# EAGLE board l1b_mk2a (EAGLE 6.4)
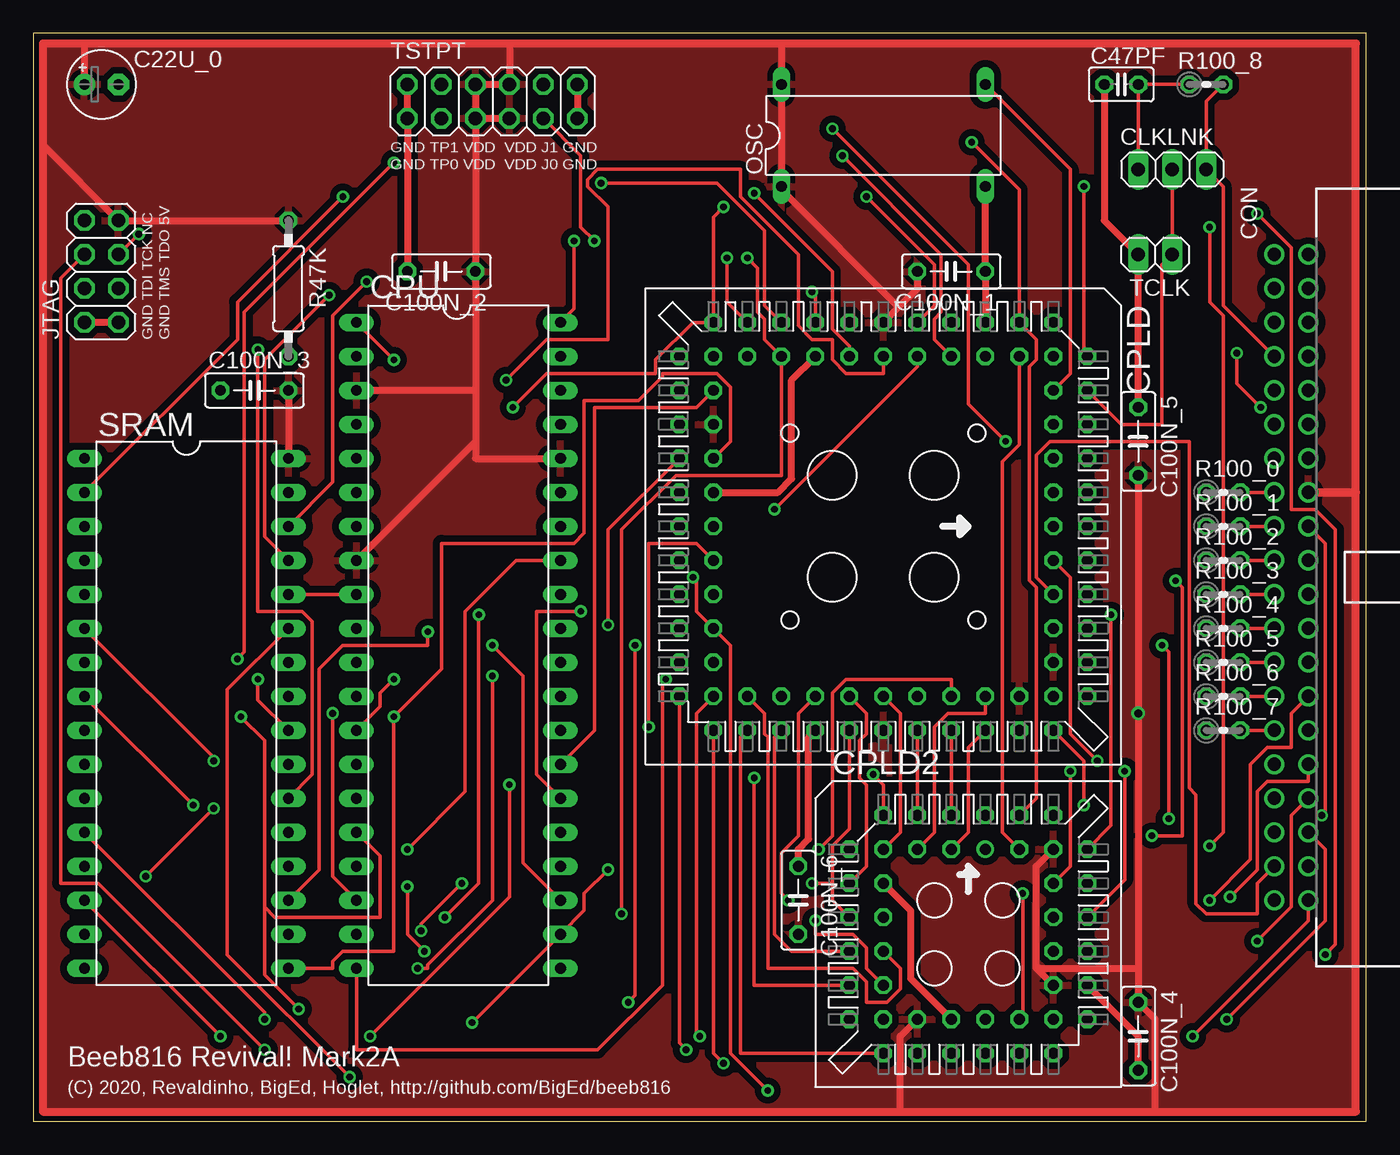
[diagram p0: board, top side]
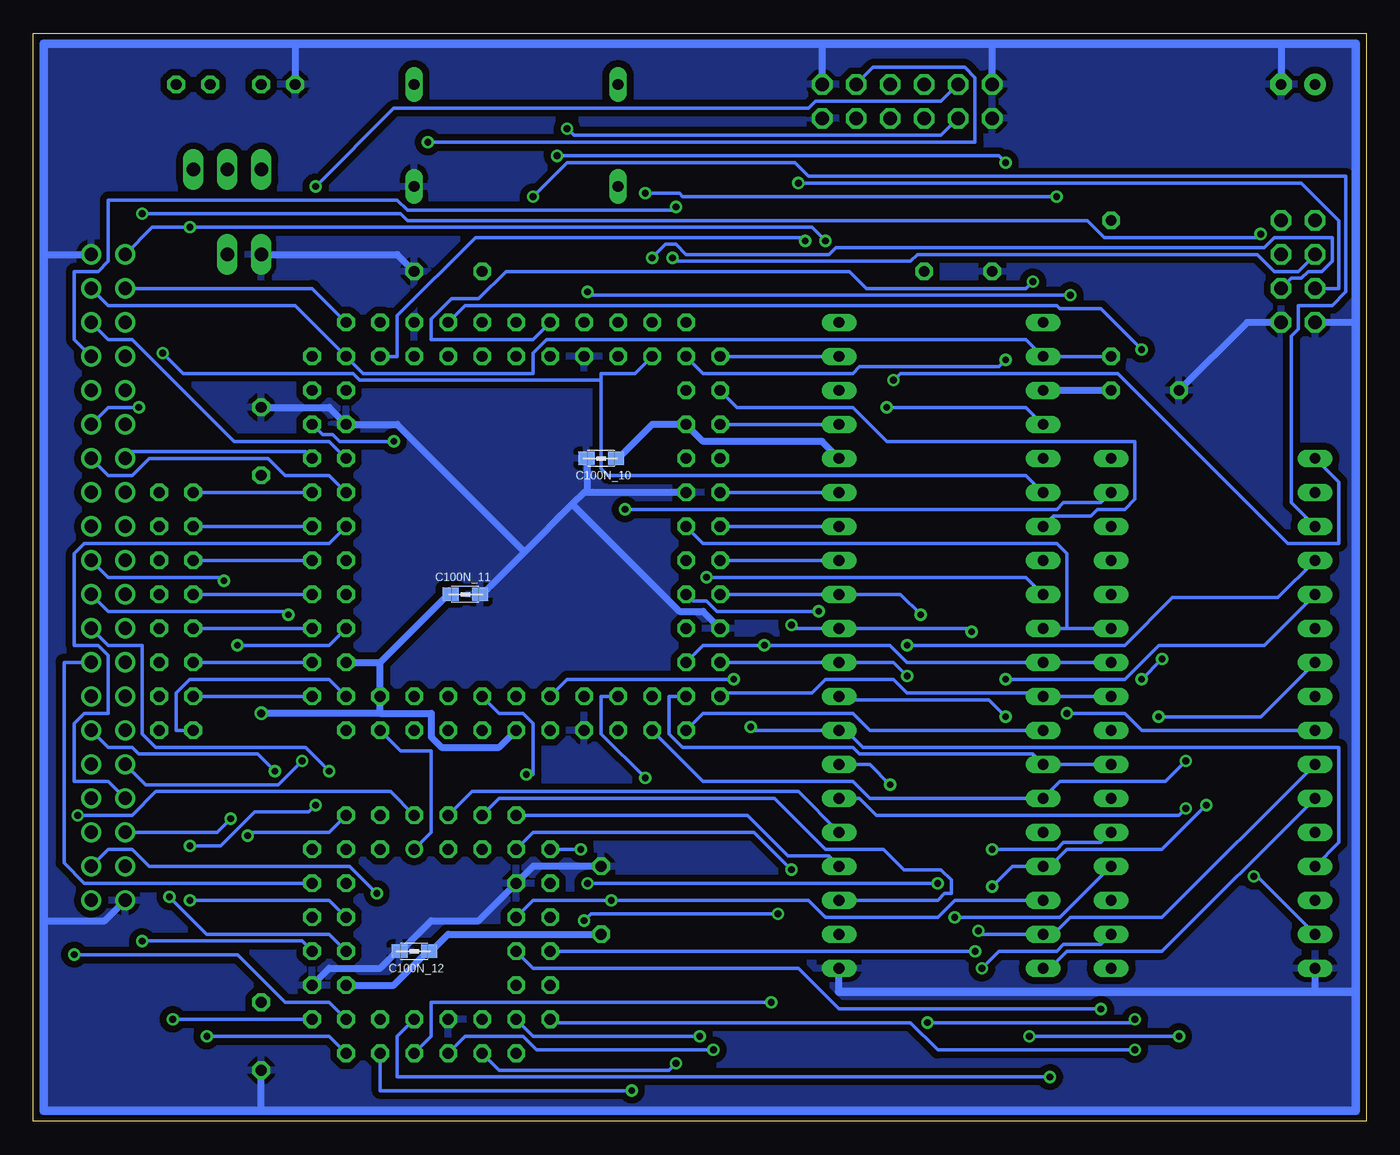
[diagram p1: board, bottom side, seen from below]

Size 99.57 x 81.28 mm. Coordinates in mm from the lower left corner, seen from the top.
Outline: 0,0 99.57,0 99.57,81.28 0,81.28 0,0
Copper layers (1*16): Top 0.035mm / dielectric 1.5mm / Bottom 0.035mm
Design rules "design_rules": minimum track width 10mil, minimum drill 20mil, track to track 10mil, track to pad 10mil, pad to pad 12mil, via to via 15mil, smd to smd 8mil, copper to edge 15mil, drill to drill 8mil, minimum pad ring 10mil, minimum via ring 8mil, stop-mask expansion 4mil, vias tented up to drill 0mil, thermal gap 15mil
Net classes: 0 signal: width 0.254 mm, clearance 0.254 mm; 1 supply: width 0.508 mm, clearance 0.305 mm

## Footprints (pad centres in the part's own frame; a part is rotated, then mirrored left to right if it is on the bottom)
E2,5-5 = drill 0.813 pad 1.6: + -1.27,0 | drill 0.813 pad 1.6 octagon: - 1.27,0
C025-025X050 = drill 0.813 octagon: 1 -1.27,0; 2 1.27,0
C050-025X075 = drill 0.813 octagon: 1 -2.54,0; 2 2.54,0
0805 = smd 1.2 x 1: 1 -1.1,0; 2 1.1,0
1X03 = drill 1.016 long: 1 -2.54,0; 2 0,0; 3 2.54,0
PAK100/2500-5-40 = drill 1 pad 1.422: 1 -24.13,-1.27; 2 -24.13,1.27; 3 -21.59,-1.27; 4 -21.59,1.27; 5 -19.05,-1.27; 6 -19.05,1.27; 7 -16.51,-1.27; 8 -16.51,1.27; 9 -13.97,-1.27; 10 -13.97,1.27; 11 -11.43,-1.27; 12 -11.43,1.27; 13 -8.89,-1.27; 14 -8.89,1.27; 15 -6.35,-1.27; 16 -6.35,1.27; 17 -3.81,-1.27; 18 -3.81,1.27; 19 -1.27,-1.27; 20 -1.27,1.27; 21 1.27,-1.27; 22 1.27,1.27; 23 3.81,-1.27; 24 3.81,1.27; 25 6.35,-1.27; 26 6.35,1.27; 27 8.89,-1.27; 28 8.89,1.27; 29 11.43,-1.27; 30 11.43,1.27; 31 13.97,-1.27; 32 13.97,1.27; 33 16.51,-1.27; 34 16.51,1.27; 35 19.05,-1.27; 36 19.05,1.27; 37 21.59,-1.27; 38 21.59,1.27; 39 24.13,-1.27; 40 24.13,1.27
PLCC-S84-SOCKET = drill 0.813 octagon: 1 0,15.24; 2 0,12.7; 3 -2.54,15.24; 4 -2.54,12.7; 5 -5.08,15.24; 6 -5.08,12.7; 7 -7.62,15.24; 8 -7.62,12.7; 9 -10.16,15.24; 10 -10.16,12.7; 11 -12.7,15.24; 12 -15.24,12.7; 13 -12.7,12.7; 14 -15.24,10.16; 15 -12.7,10.16; 16 -15.24,7.62; 17 -12.7,7.62; 18 -15.24,5.08; 19 -12.7,5.08; 20 -15.24,2.54; 21 -12.7,2.54; 22 -15.24,0; 23 -12.7,0; 24 -15.24,-2.54; 25 -12.7,-2.54; 26 -15.24,-5.08; 27 -12.7,-5.08; 28 -15.24,-7.62; 29 -12.7,-7.62; 30 -15.24,-10.16; 31 -12.7,-10.16; 32 -15.24,-12.7; 33 -12.7,-15.24; 34 -12.7,-12.7; 35 -10.16,-15.24; 36 -10.16,-12.7; 37 -7.62,-15.24; 38 -7.62,-12.7; 39 -5.08,-15.24; 40 -5.08,-12.7; 41 -2.54,-15.24; 42 -2.54,-12.7; 43 0,-15.24; 44 0,-12.7; 45 2.54,-15.24; 46 2.54,-12.7; 47 5.08,-15.24; 48 5.08,-12.7; 49 7.62,-15.24; 50 7.62,-12.7; 51 10.16,-15.24; 52 10.16,-12.7; 53 12.7,-15.24; 54 15.24,-12.7; 55 12.7,-12.7; 56 15.24,-10.16; 57 12.7,-10.16; 58 15.24,-7.62; 59 12.7,-7.62; 60 15.24,-5.08; 61 12.7,-5.08; 62 15.24,-2.54; 63 12.7,-2.54; 64 15.24,0; 65 12.7,0; 66 15.24,2.54; 67 12.7,2.54; 68 15.24,5.08; 69 12.7,5.08; 70 15.24,7.62; 71 12.7,7.62; 72 15.24,10.16; 73 12.7,10.16; 74 15.24,12.7; 75 12.7,15.24; 76 12.7,12.7; 77 10.16,15.24; 78 10.16,12.7; 79 7.62,15.24; 80 7.62,12.7; 81 5.08,15.24; 82 5.08,12.7; 83 2.54,15.24; 84 2.54,12.7
PLCC-S44-SOCKET = drill 0.813: 1 1.27,6.35 | drill 0.813 octagon: 2 -1.27,8.89; 3 -1.27,6.35; 4 -3.81,8.89; 5 -3.81,6.35; 6 -6.35,8.89; 7 -8.89,6.35; 8 -6.35,6.35; 9 -8.89,3.81; 10 -6.35,3.81; 11 -8.89,1.27; 12 -6.35,1.27; 13 -8.89,-1.27; 14 -6.35,-1.27; 15 -8.89,-3.81; 16 -6.35,-3.81; 17 -8.89,-6.35; 18 -6.35,-8.89; 19 -6.35,-6.35; 20 -3.81,-8.89; 21 -3.81,-6.35; 22 -1.27,-8.89; 23 -1.27,-6.35; 24 1.27,-8.89; 25 1.27,-6.35; 26 3.81,-8.89; 27 3.81,-6.35; 28 6.35,-8.89; 29 8.89,-6.35; 30 6.35,-6.35; 31 8.89,-3.81; 32 6.35,-3.81; 33 8.89,-1.27; 34 6.35,-1.27; 35 8.89,1.27; 36 6.35,1.27; 37 8.89,3.81; 38 6.35,3.81; 39 8.89,6.35; 40 6.35,8.89; 41 6.35,6.35; 42 3.81,8.89; 43 3.81,6.35; 44 1.27,8.89
DIL40 = drill 0.813 long: 1 -24.13,-7.62; 2 -21.59,-7.62; 3 -19.05,-7.62; 4 -16.51,-7.62; 5 -13.97,-7.62; 6 -11.43,-7.62; 7 -8.89,-7.62; 8 -6.35,-7.62; 9 -3.81,-7.62; 10 -1.27,-7.62; 11 1.27,-7.62; 12 3.81,-7.62; 13 6.35,-7.62; 14 8.89,-7.62; 15 11.43,-7.62; 16 13.97,-7.62; 17 16.51,-7.62; 18 19.05,-7.62; 19 21.59,-7.62; 20 24.13,-7.62; 21 24.13,7.62; 22 21.59,7.62; 23 19.05,7.62; 24 16.51,7.62; 25 13.97,7.62; 26 11.43,7.62; 27 8.89,7.62; 28 6.35,7.62; 29 3.81,7.62; 30 1.27,7.62; 31 -1.27,7.62; 32 -3.81,7.62; 33 -6.35,7.62; 34 -8.89,7.62; 35 -11.43,7.62; 36 -13.97,7.62; 37 -16.51,7.62; 38 -19.05,7.62; 39 -21.59,7.62; 40 -24.13,7.62
2X04 = drill 1.016 octagon: 1 -3.81,-1.27; 2 -3.81,1.27; 3 -1.27,-1.27; 4 -1.27,1.27; 5 1.27,-1.27; 6 1.27,1.27; 7 3.81,-1.27; 8 3.81,1.27
DIL14/4 = drill 0.813 long: 1 -7.62,-3.81; 7 7.62,-3.81; 8 7.62,3.81; 14 -7.62,3.81
0207/10 = drill 0.813 octagon: 1 -5.08,0; 2 5.08,0
0204V = drill 0.813 octagon: 1 -1.27,0; 2 1.27,0
DIL32 = drill 0.813 long: 1 -19.05,-7.62; 2 -16.51,-7.62; 3 -13.97,-7.62; 4 -11.43,-7.62; 5 -8.89,-7.62; 6 -6.35,-7.62; 7 -3.81,-7.62; 8 -1.27,-7.62; 9 1.27,-7.62; 10 3.81,-7.62; 11 6.35,-7.62; 12 8.89,-7.62; 13 11.43,-7.62; 14 13.97,-7.62; 15 16.51,-7.62; 16 19.05,-7.62; 17 19.05,7.62; 18 16.51,7.62; 19 13.97,7.62; 20 11.43,7.62; 21 8.89,7.62; 22 6.35,7.62; 23 3.81,7.62; 24 1.27,7.62; 25 -1.27,7.62; 26 -3.81,7.62; 27 -6.35,7.62; 28 -8.89,7.62; 29 -11.43,7.62; 30 -13.97,7.62; 31 -16.51,7.62; 32 -19.05,7.62
1X02 = drill 1.016 long: 1 -1.27,0; 2 1.27,0
2X06 = drill 1.016 octagon: 1 -6.35,-1.27; 2 -6.35,1.27; 3 -3.81,-1.27; 4 -3.81,1.27; 5 -1.27,-1.27; 6 -1.27,1.27; 7 1.27,-1.27; 8 1.27,1.27; 9 3.81,-1.27; 10 3.81,1.27; 11 6.35,-1.27; 12 6.35,1.27

## Placement (x,y rotation side)
C22U_0  [E2,5-5]  5.08,77.47 0 top
C47PF  [C025-025X050]  81.28,77.47 0 top
C100N_1  [C050-025X075]  68.58,63.5 180 top
C100N_2  [C050-025X075]  30.48,63.5 180 top
C100N_3  [C050-025X075]  16.51,54.61 0 top
C100N_4  [C050-025X075]  82.55,6.35 270 top
C100N_5  [C050-025X075]  82.55,50.8 270 top
C100N_6  [C050-025X075]  57.15,16.51 270 top
C100N_10  [0805]  57.15,49.53 0 bottom
C100N_11  [0805]  67.31,39.37 180 bottom
C100N_12  [0805]  71.12,12.7 0 bottom
CLKLNK  [1X03]  85.09,71.12 0 top
CON  [PAK100/2500-5-40]  93.98,40.64 270 top
CPLD  [PLCC-S84-SOCKET]  63.5,44.45 270 top
CPLD2  [PLCC-S44-SOCKET]  69.85,13.97 0 top
CPU  [DIL40]  31.75,35.56 270 top
JTAG  [2X04]  5.08,63.5 90 top
OSC  [DIL14/4]  63.5,73.66 0 top
R47K  [0207/10]  19.05,62.23 270 top
R100_0  [0204V]  88.9,46.99 0 top
R100_1  [0204V]  88.9,44.45 0 top
R100_2  [0204V]  88.9,41.91 0 top
R100_3  [0204V]  88.9,39.37 0 top
R100_4  [0204V]  88.9,36.83 0 top
R100_5  [0204V]  88.9,34.29 0 top
R100_6  [0204V]  88.9,31.75 0 top
R100_7  [0204V]  88.9,29.21 0 top
R100_8  [0204V]  87.63,77.47 0 top
SRAM  [DIL32]  11.43,30.48 270 top
TCLK  [1X02]  83.82,64.77 180 top
TSTPT  [2X06]  34.29,76.2 0 top

## Library data of the parts
C22U_0 C47PF C100N_1-C100N_6 R47K R100_0 R100_1-R100_8 = resistor
C100N_10-C100N_12 = wuerth-elektronik
CLKLNK JTAG TCLK TSTPT = pinhead
CON = con-3m
CPLD CPLD2 CPU OSC SRAM = ic-package

## Nets
BBC_A0: CON.18 CPLD2.44
BBC_A1: CON.20 CPLD2.40
BBC_A2: CON.22 CPLD2.39
BBC_A3: CON.24 CPLD2.38
BBC_A4: CON.26 CPLD2.37
BBC_A5: CON.28 CPLD2.36
BBC_A6: CON.30 CPLD2.35
BBC_A7: CON.32 CPLD2.34
BBC_A8: CON.34 CPLD2.33
BBC_A9: CON.36 CPLD2.29
BBC_A10: CON.38 CPLD2.27
BBC_A11: CON.40 CPLD2.28
BBC_A12: CON.37 CPLD.82
BBC_A13: CON.35 CPLD.80
BBC_A14: CON.33 CPLD.2
BBC_A15: CON.31 CPLD.84
BBC_D0: CPLD.3 R100_0.1
BBC_D1: CPLD.1 R100_1.1
BBC_D2: CPLD.83 R100_2.1
BBC_D3: CPLD.81 R100_3.1
BBC_D4: CPLD.79 R100_4.1
BBC_D5: CPLD.77 R100_5.1
BBC_D6: CPLD.75 R100_6.1
BBC_D7: CPLD.76 R100_7.1
BBC_DD0: CON.15 R100_0.2
BBC_DD1: CON.17 R100_1.2
BBC_DD2: CON.19 R100_2.2
BBC_DD3: CON.21 R100_3.2
BBC_DD4: CON.23 R100_4.2
BBC_DD5: CON.25 R100_5.2
BBC_DD6: CON.27 R100_6.2
BBC_DD7: CON.29 R100_7.2
BBC_PHI0: CLKLNK.3 CON.7 R100_8.2
BBC_PHI0_FILT: C47PF.2 CLKLNK.1 R100_8.1
BBC_PHI1: CON.6 CPLD.6
BBC_PHI2: CON.3 CPLD.12
BBC_RNW: CON.13 CPLD.5
BBC_SYNC: CON.14 CPLD.4
CPU_A0: CPLD2.26 CPLD.50 CPU.9 SRAM.28
CPU_A1: CPLD2.25 CPLD.44 CPU.10 SRAM.27
CPU_A2: CPLD2.24 CPLD.52 CPU.11 SRAM.26
CPU_A3: CPLD2.22 CPLD.53 CPU.12 SRAM.25
CPU_A4: CPLD2.20 CPLD.54 CPU.13 SRAM.5
CPU_A5: CPLD2.19 CPLD.55 CPU.14 SRAM.23
CPU_A6: CPLD2.18 CPLD.56 CPU.15 SRAM.6
CPU_A7: CPLD2.14 CPLD.57 CPU.16 SRAM.7
CPU_A8: CPLD2.13 CPLD.58 CPU.17 SRAM.8
CPU_A9: CPLD2.12 CPLD.61 CPU.18 SRAM.9
CPU_A10: CPLD2.11 CPLD.62 CPU.19 SRAM.10
CPU_A11: CPLD2.9 CPLD.63 CPU.20 SRAM.11
CPU_A12: CPLD2.8 CPLD.65 CPU.22 SRAM.12
CPU_A13: CPLD2.4 CPLD.66 CPU.23 SRAM.4
CPU_A14: CPLD2.6 CPLD.67 CPU.24
CPU_A15: CPLD2.2 CPLD.68 CPU.25
CPU_D0: CPLD.45 CPU.33 SRAM.21
CPU_D1: CPLD.47 CPU.32 SRAM.20
CPU_D2: CPLD.39 CPU.31 SRAM.19
CPU_D3: CPLD.51 CPU.30 SRAM.18
CPU_D4: CPLD.40 CPU.29 SRAM.17
CPU_D5: CPLD.46 CPU.28 SRAM.13
CPU_D6: CPLD.36 CPU.27 SRAM.14
CPU_D7: CPLD.48 CPU.26 SRAM.15
CPU_E: CPLD.41 CPU.35
CPU_PHI2: CPLD.37 CPU.37
CPU_RNW: CPLD.43 CPU.34
CPU_VDA: CPLD.33 CPU.39
CPU_VPA: CPLD.35 CPU.7
CPU_VPB: CPLD.34 CPU.1
DEC_FE4X: CPLD2.1 CPLD.72
DEC_ROM_REG: CPLD2.3 CPLD.70
DEC_SHADOW_REG: CPLD2.5 CPLD.71
GND [supply]: C22U_0.- C47PF.1 C100N_1.1 C100N_2.2 C100N_3.1 C100N_4.2 C100N_5.1 C100N_6.1 C100N_10.1 C100N_11.1 C100N_12.1 CON.2 CON.39 CPLD2.10 CPLD2.23 CPLD2.31 CPLD.8 CPLD.16 CPLD.27 CPLD.42 CPLD.49 CPLD.60 CPU.21 JTAG.1 JTAG.2 OSC.7 SRAM.16 TCLK.2 TSTPT.1 TSTPT.2 TSTPT.11 TSTPT.12
HSCLK: CPLD.10 OSC.8
IRQB: CON.8 CPLD.32 CPU.4
J0: CPLD2.43 CPLD.15 TSTPT.9
J1: CPLD2.42 CPLD.14 TSTPT.10
LAT_EN: CPLD2.7 CPLD.69
NMIB: CON.12 CPLD.31 CPU.6
PHI0: CLKLNK.2 CPLD.9 TCLK.1
RAM_A14: CPLD.20 SRAM.3
RAM_A15: CPLD.21 SRAM.31
RAM_A16: CPLD.25 SRAM.2
RAM_A17: CPLD.24 SRAM.30
RAM_A18: CPLD.23 SRAM.1
RAM_CEB: CPLD.18 SRAM.22
RAM_OEB: CPLD.19 SRAM.24
RAM_WEB: CPLD.26 SRAM.29
RDY: CON.4 CPLD.13 CPU.2 R47K.2
RESETB: CON.1 CPLD.74 CPU.40
TCK: CPLD2.17 CPLD.30 JTAG.6
TDI: CPLD.28 JTAG.4
TDI_INT: CPLD2.15 CPLD.59
TDO: CPLD2.30 JTAG.5
TMS: CPLD2.16 CPLD.29 JTAG.3
TP0: CPLD.7 TSTPT.3
TP1: CPLD.11 TSTPT.4
VDD [supply]: C22U_0.+ C100N_1.2 C100N_2.1 C100N_3.2 C100N_4.1 C100N_5.2 C100N_6.2 C100N_10.2 C100N_11.2 C100N_12.2 CON.16 CPLD2.21 CPLD2.32 CPLD2.41 CPLD.22 CPLD.38 CPLD.64 CPLD.73 CPLD.78 CPU.3 CPU.8 CPU.36 JTAG.7 OSC.1 OSC.14 R47K.1 SRAM.32 TSTPT.5 TSTPT.6 TSTPT.7 TSTPT.8

## Tracks (layer width: path | path; a pad name or v marks a point on that pad's centre or on a via)
BBC_A0  (via drill 0.51)
  Top 0.254: v96.27,22.86 96.52,23.11 96.52,43.18 CON.18
  Bottom 0.254: CPLD2.44 72.9,24.64 90.42,24.64 92.2,22.86 v96.27,22.86
BBC_A1  (via drill 0.51)
  Top 0.254: v83.57,21.34 85.85,21.34 85.85,39.88 v85.34,40.39
  Bottom 0.254: CPLD2.40 77.47,21.59 83.31,21.59 v83.57,21.34 | v85.34,40.39 85.6,40.64 93.98,40.64 CON.20
BBC_A2  (via drill 0.51)
  Top 0.254: CPLD2.39 80.52,22.1 v80.52,37.85
  Bottom 0.254: v80.52,37.85 80.77,38.1 93.98,38.1 CON.22
BBC_A3  (via drill 0.51)
  Top 0.254: CPLD2.38 77.47,19.05 v77.47,26.16
  Bottom 0.254: v77.47,26.16 79.25,27.94 90.42,27.94 91.44,28.96 91.44,35.56 93.98,35.56 CON.24
BBC_A4
  Bottom 0.254: CPLD2.37 95.76,17.78 97.28,19.3 97.28,34.29 CON.26
BBC_A5  (via drill 0.51)
  Top 0.254: v87.88,16.51 90.93,19.56 90.93,26.67 92.2,27.94 93.98,27.94 93.98,30.48 CON.28
  Bottom 0.254: CPLD2.36 77.47,16.51 v87.88,16.51
BBC_A6  (via drill 0.51)
  Top 0.254: CPLD2.35 81.53,18.03 v81.53,26.16
  Bottom 0.254: v81.53,26.16 82.8,27.43 91.69,27.43 92.2,27.94 93.98,27.94 CON.30
BBC_A7  (via drill 0.51)
  Top 0.254: v89.41,16.76 91.44,18.8 91.44,24.64 92.2,25.4 95.25,25.4 CON.32
  Bottom 0.254: CPLD2.34 77.47,13.97 86.61,13.97 v89.41,16.76
BBC_A8  (via drill 0.51)
  Top 0.254: v91.44,13.46 93.98,16 93.98,22.86 CON.34
  Bottom 0.254: CPLD2.33 79.5,13.46 v91.44,13.46
BBC_A9  (via drill 0.51)
  Top 0.254: v89.15,7.62 96.52,14.99 96.52,20.32 CON.36
  Bottom 0.254: v89.15,7.62 CPLD2.29
BBC_A10  (via drill 0.51)
  Top 0.254: CPLD2.27 73.91,7.87 v73.91,17.02
  Bottom 0.254: v73.91,17.02 75.95,19.05 90.93,19.05 92.2,20.32 93.98,20.32 CON.38
BBC_A11  (via drill 0.51)
  Top 0.254: v86.61,6.35 95.25,14.99 CON.40
  Bottom 0.254: CPLD2.28 77.47,6.35 v86.61,6.35
BBC_A12
  Top 0.254: CPLD.82 74.93,40.64 74.93,49.78 75.95,50.8 86.36,50.8 86.36,24.89 86.87,24.38 86.87,16.26 87.63,15.49 91.44,15.49 91.44,17.78 CON.37
BBC_A13  (via drill 0.51)
  Top 0.254: v84.33,35.56 84.84,35.05 v84.84,22.61
  Bottom 0.254: CPLD.80 77.47,35.56 v84.33,35.56 | v84.84,22.61 85.85,21.59 CON.35
BBC_A14
  Bottom 0.254: CPLD.2 77.47,43.18 95.76,43.18 96.52,42.42 96.52,35.56 94.74,35.56 93.98,34.8 93.98,30.48 95.76,30.48 96.52,29.72 96.52,25.4 93.98,25.4 CON.33
BBC_A15  (via drill 0.51)
  Top 0.254: CPLD.84 77.47,40.64 77.47,28.96 v79.5,26.92
  Bottom 0.254: v79.5,26.92 81.28,25.15 91.19,25.15 CON.31
BBC_D0
  Bottom 0.254: R100_0.1 CPLD.3
BBC_D1
  Bottom 0.254: R100_1.1 CPLD.1
BBC_D2
  Bottom 0.254: R100_2.1 CPLD.83
BBC_D3
  Bottom 0.254: R100_3.1 CPLD.81
BBC_D4
  Bottom 0.254: R100_4.1 CPLD.79
BBC_D5
  Bottom 0.254: R100_5.1 CPLD.77
BBC_D6
  Bottom 0.254: R100_6.1 CPLD.75
BBC_D7
  Bottom 0.254: CPLD.76 77.47,33.02 87.88,33.02 88.9,32 88.9,29.21 R100_7.1
BBC_DD0
  Top 0.254: CON.15 R100_0.2
BBC_DD1
  Top 0.254: CON.17 R100_1.2
BBC_DD2
  Top 0.254: CON.19 R100_2.2
BBC_DD3
  Top 0.254: CON.21 R100_3.2
BBC_DD4
  Top 0.254: CON.23 R100_4.2
BBC_DD5
  Top 0.254: CON.25 R100_5.2
BBC_DD6
  Top 0.254: CON.27 R100_6.2
BBC_DD7
  Top 0.254: CON.29 R100_7.2
BBC_PHI0
  Top 0.254: R100_8.2 87.63,76.2 CLKLNK.3 88.9,69.85 88.9,60.96 CON.7
BBC_PHI0_FILT
  Top 0.254: R100_8.1 C47PF.2 CLKLNK.1
BBC_PHI1
  Bottom 0.254: CPLD.6 77.47,50.8 84.58,50.8 92.2,58.42 93.98,58.42 CON.6
BBC_PHI2
  Bottom 0.254: CPLD.12 78.74,62.23 CON.3
BBC_RNW
  Bottom 0.254: CPLD.5 79.25,50.04 92.2,50.04 CON.13
BBC_SYNC
  Bottom 0.254: CPLD.4 77.47,48.26 80.77,48.26 82.04,49.53 90.93,49.53 92.2,48.26 93.98,48.26 CON.14
CPU_A0  (via drill 0.51)
  Top 0.254: CPU.9 SRAM.28 | v54.86,2.29 52.07,5.08 52.07,35.56 CPLD.50 49.53,38.1 49.53,40.39 v49.28,40.64
  Bottom 0.254: CPLD2.26 73.66,2.29 v54.86,2.29 | CPU.9 25.4,40.64 v49.28,40.64
CPU_A1  (via drill 0.51)
  Top 0.254: v23.62,3.3 14.48,12.45 14.48,32.26 SRAM.27
  Bottom 0.254: CPU.10 22.35,36.83 | 22.35,36.83 SRAM.27 | CPLD2.25 72.39,6.35 72.39,3.3 v23.62,3.3 | CPLD.44 49.53,43.18 23.11,43.18 22.35,42.42 22.35,36.83
CPU_A2  (via drill 0.51)
  Top 0.254: v44.45,8.89 44.96,9.4 v44.96,35.56
  Bottom 0.254: SRAM.26 CPU.11 34.29,34.29 35.56,35.56 v44.96,35.56 49.53,35.56 CPLD.52 | CPLD2.24 69.85,6.35 69.85,8.89 v44.45,8.89
CPU_A3  (via drill 0.51)
  Top 0.254: v48.77,5.33 48.26,5.84 CPLD.53
  Bottom 0.254: SRAM.25 CPU.12 24.38,32 34.29,32 35.31,33.02 40.39,33.02 41.4,32 48.01,32 CPLD.53 | CPLD2.22 67.31,6.35 62.99,6.35 61.98,5.33 v48.77,5.33
CPU_A4  (via drill 0.51)
  Top 0.254: v26.92,33.02 25.91,32 25.91,30.99 CPU.13 | v51.56,4.32 50.8,5.08 CPLD.54
  Bottom 0.254: CPU.13 37.08,29.21 38.35,30.48 49.53,30.48 CPLD.54 | SRAM.5 7.62,35.56 15.49,35.56 18.03,33.02 v26.92,33.02 | CPLD2.20 64.77,3.81 52.07,3.81 v51.56,4.32
CPU_A5  (via drill 0.51)
  Top 0.254: v49.78,6.35 49.53,6.6 49.53,30.48 CPLD.55
  Bottom 0.254: SRAM.23 CPU.14 24.89,27.43 37.85,27.43 38.35,27.94 51.05,27.94 52.07,28.96 52.07,31.75 CPLD.55 | CPLD2.19 62.23,6.35 v49.78,6.35
CPU_A6  (via drill 0.51)
  Top 0.254: CPLD2.18 52.83,5.08 52.83,28.7 CPLD.56 | SRAM.6 13.46,27.18 v13.46,26.92
  Bottom 0.254: CPLD.56 49.53,25.4 38.35,25.4 37.08,24.13 CPU.15 22.86,25.4 14.99,25.4 v13.46,26.92
CPU_A7  (via drill 0.51)
  Top 0.254: CPLD2.14 64.77,11.43 64.77,9.91 63.75,8.89 62.23,8.89 62.23,10.41 61.21,11.43 54.86,11.43 54.86,28.7 54.61,28.96 54.61,30.48 CPLD.57 | v15.49,30.23 17.27,28.45 17.27,16 | 17.27,16 18.03,15.24 25.91,15.24 25.91,19.81 CPU.16 | v19.81,8.38 17.27,10.92 17.27,16
  Bottom 0.254: SRAM.7 7.87,30.23 v15.49,30.23 | CPLD2.14 62.23,11.43 42.42,11.43 39.37,8.38 v19.81,8.38
CPU_A8  (via drill 0.51)
  Top 0.254: CPLD2.13 56.64,12.7 55.37,13.97 55.37,28.7 CPLD.58 | v11.94,23.62 SRAM.8 | v29.21,12.7 27.94,13.97 v27.94,17.53
  Bottom 0.254: v11.94,23.62 15.24,20.32 22.35,20.32 23.62,19.05 CPU.17 26.42,19.05 v27.94,17.53 | v29.21,12.7 CPLD2.13
CPU_A9  (via drill 0.51)
  Top 0.254: v22.35,30.48 22.35,18.29 CPU.18 | CPLD.61 57.15,30.48 57.15,21.34 55.88,20.07 55.88,17.02 v56.39,16.51
  Bottom 0.254: SRAM.9 16.76,29.21 18.03,30.48 v22.35,30.48 | CPLD2.12 62.23,16.51 v56.39,16.51 41.66,16.51 40.39,15.24 32,15.24 30.73,16.51 CPU.18
CPU_A10  (via drill 0.51)
  Top 0.254: CPLD2.11 59.69,16.51 59.69,17.78 | 59.69,17.78 59.69,20.57 60.96,21.84 CPLD.62 | v58.17,17.78 59.69,17.78 | v32,17.78 28.96,14.73 v28.96,14.22
  Bottom 0.254: SRAM.10 15.24,15.24 22.1,15.24 23.37,13.97 CPU.19 28.7,13.97 v28.96,14.22 | v32,17.78 v58.17,17.78
CPU_A11  (via drill 0.51)
  Top 0.254: CPLD2.9 62.23,19.05 62.23,25.15 61.72,25.65 61.72,28.45 62.23,28.96 62.23,30.48 CPLD.63 | v47.24,33.02 46.99,32.77 46.99,10.16 42.16,5.33 24.13,5.33 CPU.20
  Bottom 0.254: SRAM.11 15.24,12.7 22.35,12.7 23.62,11.43 CPU.20 | CPLD.63 59.69,33.02 v47.24,33.02
CPU_A12  (via drill 0.51)
  Top 0.254: CPLD2.8 64.77,21.59 64.77,30.48 CPLD.65 | SRAM.12 17.27,8.13 v17.27,7.62 | v32.77,7.37 CPU.22 41.15,15.75 41.15,17.02 v42.93,18.8
  Bottom 0.254: v17.27,7.62 17.53,7.37 v32.77,7.37 | CPLD2.8 62.23,21.59 45.72,21.59 v42.93,18.8
CPU_A13  (via drill 0.51)
  Top 0.254: CPLD.66 CPLD2.4 | v34.29,35.56 36.58,33.27 36.58,19.3 CPU.23
  Bottom 0.254: SRAM.4 6.6,39.12 14.48,39.12 18.03,35.56 v34.29,35.56 | CPLD2.4 64.77,24.13 44.2,24.13 40.39,20.32 36.07,20.32 34.54,18.8 31.75,18.8 30.99,18.03 30.99,17.02 31.5,17.02 32,16.51 CPU.23
CPU_A14  (via drill 0.51)
  Top 0.254: v62.74,25.91 63.5,25.15 CPLD2.6
  Bottom 0.254: CPU.24 40.13,19.81 43.18,19.81 46.23,22.86 CPLD2.6 | CPLD.67 64.77,30.48 62.99,30.48 62.23,29.72 62.23,25.91 v62.74,25.91
CPU_A15
  Top 0.254: CPLD2.2 CPLD.68
  Bottom 0.254: CPU.25 42.42,24.64 66.8,24.64 CPLD2.2
CPU_D0  (via drill 0.51)
  Top 0.254: v27.94,20.32 32.26,24.64 32.26,38.1 36.07,41.91 CPU.33
  Bottom 0.254: SRAM.21 19.81,20.83 22.61,20.83 23.11,20.32 v27.94,20.32 | CPU.33 CPLD.45
CPU_D1  (via drill 0.51)
  Top 0.254: v30.73,15.24 33.27,17.78 v33.27,37.85
  Bottom 0.254: SRAM.20 22.86,15.24 v30.73,15.24 | v33.27,37.85 34.8,39.37 CPU.32 CPLD.47
CPU_D2  (via drill 0.51)
  Top 0.254: SRAM.19 21.34,18.8 21.34,33.78 23.11,35.56 29.46,35.56 v29.46,36.58 | CPLD.39 42.93,44.2 v42.93,37.08
  Bottom 0.254: v29.46,36.58 29.72,36.83 CPU.31 42.67,36.83 v42.93,37.08
CPU_D3  (via drill 0.51)
  Top 0.254: v28.7,11.43 29.46,11.43 29.46,11.68 34.29,16.51 v34.29,33.27
  Bottom 0.254: SRAM.18 19.81,13.21 22.61,13.21 23.11,12.7 27.43,12.7 v28.7,11.43 | v34.29,33.27 35.31,34.29 CPU.30 CPLD.51
CPU_D4  (via drill 0.51)
  Top 0.254: SRAM.17 22.35,11.43 22.35,11.94 23.11,12.7 26.92,12.7 v26.92,30.23 30.48,33.78 30.48,43.18 40.39,43.18 41.15,43.94 41.15,53.85 45.21,53.85 46.99,55.63 46.99,55.88 51.05,55.88 52.07,54.86 52.07,50.8 CPLD.40
  Bottom 0.254: v26.92,30.23 28.19,31.5 39.12,31.5 CPU.29
CPU_D5  (via drill 0.51)
  Top 0.254: CPLD.46 49.53,43.18 45.97,43.18 v45.97,29.46
  Bottom 0.254: SRAM.13 2.03,20.83 2.03,27.94 37.59,27.94 38.86,29.21 CPU.28 45.72,29.21 v45.97,29.46
CPU_D6  (via drill 0.51)
  Top 0.254: v13.97,6.35 SRAM.14 | v25.15,6.35 35.56,16.76 v35.56,25.15 | CPLD.36 49.53,53.34 41.91,53.34 41.91,29.21 CPU.27
  Bottom 0.254: v25.15,6.35 v13.97,6.35 | v35.56,25.15 37.08,26.67 CPU.27
CPU_D7  (via drill 0.51)
  Top 0.254: v13.46,23.37 v8.38,18.29 | v40.89,38.1 37.59,38.1 37.59,25.91 CPU.26
  Bottom 0.254: SRAM.15 8.13,18.29 v8.38,18.29 | v13.46,23.37 13.97,22.86 36.58,22.86 37.85,24.13 CPU.26 | CPLD.48 50.29,38.86 49.28,38.86 48.51,38.1 v40.89,38.1
CPU_E
  Bottom 0.254: CPLD.41 CPU.35
CPU_PHI2
  Bottom 0.254: CPLD.37 CPU.37
CPU_RNW
  Bottom 0.254: CPLD.43 CPU.34
CPU_VDA
  Bottom 0.254: CPLD.33 CPU.39
CPU_VPA
  Bottom 0.254: CPU.7 23.37,45.21 20.57,45.21 20.07,45.72 18.03,45.72 17.27,46.48 17.27,50.8 35.81,50.8 38.35,53.34 46.99,53.34 CPLD.35
CPU_VPB  (via drill 0.51)
  Top 0.254: v26.92,56.9 CPU.1
  Bottom 0.254: v26.92,56.9 27.43,56.39 37.85,56.39 38.35,55.88 49.53,55.88 CPLD.34
DEC_FE4X
  Bottom 0.254: CPLD2.1 69.85,21.59 69.85,27.69 72.14,27.69 CPLD.72
DEC_ROM_REG
  Top 0.254: CPLD2.3 69.85,21.59 69.85,27.94 CPLD.70
DEC_SHADOW_REG
  Top 0.254: CPLD2.5 67.31,21.59 67.31,29.46 68.33,30.48 71.12,30.48 CPLD.71
GND
  Top 0.508: CPLD.27 56.64,55.37 56.64,48.01 55.63,46.99 CPLD.42 | CPLD2.23 65.53,10.67 65.53,15.75 CPLD2.10 | CPLD.60 57.91,28.7 57.91,21.08 57.15,20.32 C100N_6.1 | CPLD.16 C100N_1.1 OSC.7 | C100N_5.1 TCLK.2 80.01,67.31 C47PF.1 | JTAG.1 JTAG.2 | C100N_2.2 TSTPT.1 TSTPT.2 | TSTPT.12 TSTPT.11 | CPLD2.31 82.55,6.35 C100N_4.2
  Bottom 0.508: 58.17,46.99 58.17,49.53 C100N_10.1 | CPLD.42 58.17,46.99 | 59.31,46.1 58.42,46.99 58.17,46.99 | 59.31,46.1 62.87,42.55 | 62.87,42.55 66.04,39.37 C100N_11.1 | CPLD.49 49.53,38.1 51.31,38.1 59.31,46.1 | C100N_6.1 62.23,19.05 CPLD2.10 66.29,14.99 69.85,14.99 72.14,12.7 C100N_12.1 72.39,12.7 73.66,11.43 77.47,11.43 CPLD2.31 | C100N_5.1 77.47,53.34 CPLD.8 72.39,52.07 62.87,42.55 | C100N_1.1 72.39,64.77 TCLK.2 | C100N_3.1 8.89,59.69 JTAG.1 | 3.81,9.65 SRAM.16 | 39.37,9.65 CPU.21 | 82.55,0.76 C100N_4.2 | 80.01,80.52 C47PF.1 | CON.39 94.23,14.99 98.81,14.99 | 98.81,64.77 CON.2 | 6.35,80.52 C22U_0.- | 40.64,80.52 TSTPT.12 | 27.94,80.52 TSTPT.2 | 0.76,59.69 JTAG.2
  Bottom 0.635: 0.76,9.65 0.76,59.69 0.76,80.52 6.35,80.52 27.94,80.52 40.64,80.52 80.01,80.52 98.81,80.52 98.81,64.77 98.81,14.99 98.81,0.76 82.55,0.76 0.76,0.76 0.76,9.65 | 39.37,9.65 3.81,9.65 0.76,9.65
  pour Bottom (isolate 0.508): 0,0 0,81.28 99.57,81.28 99.57,0
HSCLK
  Top 0.254: CPLD.10 77.47,55.88 77.47,71.12 OSC.8
IRQB  (via drill 0.51)
  Top 0.254: v35.81,53.34 38.35,55.88 46.48,55.88 46.48,56.9 49.28,59.69 CPLD.32 50.8,67.56 v51.56,68.33
  Bottom 0.254: CPU.4 25.4,53.34 v35.81,53.34 | CON.8 96.52,58.42 96.52,63.5 94.74,63.5 93.98,64.26 93.98,68.83 72.39,68.83 71.63,68.07 51.82,68.07 v51.56,68.33
J0  (via drill 0.51)
  Top 0.254: CPLD2.43 72.39,21.59 72.39,49.28 73.66,50.55 CPLD.15 | TSTPT.9 40.89,72.14 40.89,66.8 v41.91,65.79
  Bottom 0.254: v41.91,65.79 42.16,66.04 66.55,66.04 72.39,60.2 72.39,57.15 CPLD.15
J1  (via drill 0.51)
  Top 0.254: CPLD2.42 74.93,24.13 74.93,39.88 74.42,40.39 74.42,56.39 74.93,56.9 74.93,58.42 CPLD.14 73.66,69.6 v70.1,73.15
  Bottom 0.254: TSTPT.10 36.83,78.74 29.97,78.74 29.21,77.98 29.21,73.15 v70.1,73.15
LAT_EN  (via drill 0.51)
  Top 0.254: v58.67,20.32 59.69,21.34 59.69,32 60.71,33.02 68.58,33.02 CPLD.69
  Bottom 0.254: v58.67,20.32 CPLD2.7
NMIB  (via drill 0.51)
  Top 0.254: v91.69,53.34 89.92,55.12 v89.92,57.4
  Bottom 0.254: CPU.6 25.4,48.26 56.64,48.26 57.15,48.77 57.15,55.37 | 57.15,55.37 57.15,55.88 54.61,55.88 CPLD.31 | CON.12 93.98,53.34 v91.69,53.34 | v89.92,57.4 88.39,55.88 75.69,55.88 75.18,55.37 57.15,55.37
PHI0
  Top 0.254: CPLD.9 81.28,52.07 84.33,52.07 84.33,64.01 TCLK.1 CLKLNK.2
RAM_A14  (via drill 0.51)
  Top 0.254: v62.23,69.09 67.31,64.01 67.31,60.96 CPLD.20
  Bottom 0.254: SRAM.3 5.59,46.23 5.59,58.67 5.08,59.18 5.08,60.96 2.54,60.96 1.52,61.98 1.52,70.61 41.66,70.61 42.67,71.63 59.69,71.63 v62.23,69.09
RAM_A15  (via drill 0.51)
  Top 0.254: v55.37,45.72 66.04,56.39 CPLD.21
  Bottom 0.254: SRAM.31 19.81,46.23 22.61,46.23 23.11,45.72 v55.37,45.72
RAM_A16  (via drill 0.51)
  Top 0.254: SRAM.2 15.24,58.42 15.24,61.21 v23.11,69.09 | v53.85,69.34 59.69,63.5 59.69,59.18 60.96,57.91 CPLD.25
  Bottom 0.254: v23.11,69.09 51.05,69.09 51.31,69.34 v53.85,69.34
RAM_A17  (via drill 0.51)
  Top 0.254: SRAM.30 22.35,47.75 22.35,60.2 v24.89,62.74
  Bottom 0.254: v24.89,62.74 25.4,62.23 37.34,62.23 38.61,63.5 64.26,63.5 66.29,61.47 68.33,61.47 69.85,59.94 69.85,58.42 62.23,58.42 CPLD.24
RAM_A18  (via drill 0.51)
  Top 0.254: v35.31,55.37 38.35,58.42 42.93,58.42 42.93,68.33 41.4,69.85 41.4,70.36 42.16,71.12 52.83,71.12 52.83,69.09 57.15,64.77 57.15,59.44 58.17,58.42 59.69,58.42 59.69,56.9 60.71,55.88 63.5,55.88 CPLD.23
  Bottom 0.254: SRAM.1 2.03,47.75 2.03,43.18 5.84,43.18 18.54,55.88 34.8,55.88 v35.31,55.37
RAM_CEB  (via drill 0.51)
  Top 0.254: SRAM.22 20.83,25.91 20.83,37.34 20.07,38.1 16.76,38.1 v16.76,57.66
  Bottom 0.254: v16.76,57.66 19.81,60.71 22.86,60.71 23.11,60.96 67.31,60.96 CPLD.18
RAM_OEB  (via drill 0.51)
  Top 0.254: SRAM.24 16.76,31.5 v16.76,33.02 | v15.24,34.54 15.75,35.05 15.75,60.45 v26.92,71.63 | v60.45,72.14 67.82,64.77 67.82,60.45 67.31,59.94 67.31,58.42 CPLD.19
  Bottom 0.254: v15.24,34.54 v16.76,33.02 | v26.92,71.63 27.43,72.14 v60.45,72.14
RAM_WEB  (via drill 0.51)
  Top 0.254: SRAM.29 17.27,43.69 17.27,56.9 v22.1,61.72 | v58.17,61.98 58.42,61.72 CPLD.26
  Bottom 0.254: v22.1,61.72 57.91,61.72 v58.17,61.98
RDY
  Bottom 0.254: R47K.2 CPU.2 25.4,58.42 61.21,58.42 62.23,57.4 62.23,55.88 74.93,55.88 CPLD.13 80.01,60.96 93.98,60.96 CON.4
RESETB  (via drill 0.51)
  Top 0.254: CPU.40 40.39,60.71 v40.39,65.79 | CPLD.74 78.49,26.92 v78.49,23.62 | v87.88,20.57 88.9,21.59 88.9,60.2 87.88,61.21 v87.88,66.8
  Bottom 0.254: v40.39,65.79 41.4,66.8 v87.88,66.8 90.68,66.8 CON.1 | v78.49,23.62 78.99,23.11 83.06,23.11 85.6,20.57 v87.88,20.57
TCK  (via drill 0.51)
  Top 0.254: v17.27,5.33 4.83,17.78 2.03,17.78 2.03,62.99 JTAG.6 | CPLD.30 51.82,61.21 v51.82,64.52
  Bottom 0.254: CPLD2.17 60.71,7.37 34.04,7.37 32,5.33 v17.27,5.33 | v51.82,64.52 51.56,64.26 34.04,64.26 33.53,64.77 8.13,64.77 6.86,63.5 5.08,63.5 JTAG.6
TDI  (via drill 0.51)
  Top 0.254: CPLD.28 54.61,60.96 54.61,66.55 51.05,70.1 v42.42,70.1
  Bottom 0.254: v42.42,70.1 4.83,70.1 2.03,67.31 2.03,62.23 JTAG.4
TDI_INT  (via drill 0.51)
  Top 0.254: CPLD2.15 53.85,10.16 v53.85,25.65
  Bottom 0.254: v53.85,25.65 57.15,28.96 57.15,31.75 CPLD.59
TDO  (via drill 0.51)
  Top 0.254: v96.52,12.45 97.28,13.21 97.28,44.2 95.76,45.72 93.98,45.72 93.98,65.28 v91.44,67.82 | JTAG.5 v7.87,66.29
  Bottom 0.254: CPLD2.30 77.47,8.89 80.77,8.89 84.33,12.45 v96.52,12.45 | v91.44,67.82 72.14,67.82 71.63,67.31 20.83,67.31 19.56,66.04 8.13,66.04 v7.87,66.29
TMS  (via drill 0.51)
  Top 0.254: CPLD2.16 62.23,11.43 62.23,12.95 61.21,13.97 58.42,13.97 v58.42,14.99 | v43.94,15.49 43.94,44.2 48.01,48.26 55.88,48.26 CPLD.29 54.61,58.42 54.61,59.94 54.1,60.45 54.1,63.75 v53.34,64.52
  Bottom 0.254: v58.42,14.99 57.91,15.49 v43.94,15.49 | JTAG.3 5.59,62.99 4.83,62.99 4.32,63.5 3.3,63.5 2.54,64.26 2.54,66.04 6.86,66.04 7.62,65.28 39.62,65.28 40.13,64.77 50.8,64.77 51.56,65.53 52.32,65.53 v53.34,64.52
TP0  (via drill 0.51)
  Top 0.254: v72.64,50.8 69.85,53.59 69.85,64.01 v59.69,74.17
  Bottom 0.254: CPLD.7 77.98,51.31 77.22,51.31 76.71,50.8 v72.64,50.8 | v59.69,74.17 59.18,73.66 31.75,73.66 TSTPT.3
TP1  (via drill 0.51)
  Top 0.254: CPLD.11 78.49,57.4 v78.49,69.85
  Bottom 0.254: v78.49,69.85 72.64,75.69 41.66,75.69 41.15,76.2 31.75,76.2 TSTPT.4
VDD  (via drill 0.6 pad 0.91)
  Top 0.508: 33.02,54.61 C100N_2.1 TSTPT.5 | 33.02,54.61 33.02,50.8 | 33.02,50.8 33.02,49.53 CPU.36 | C100N_5.2 82.55,11.43 | 82.55,11.43 C100N_4.1 83.82,7.62 83.82,0.71 | CPLD2.41 74.93,19.05 74.93,11.43 75.06,11.3 | CPLD2.32 75.06,11.3 | 82.55,11.43 75.18,11.43 75.06,11.3 | C100N_3.2 SRAM.32 | 33.02,50.8 CPU.8 | 33.02,54.61 CPU.3 | 64.64,60.83 66.04,62.23 C100N_1.2 | 64.64,60.83 CPLD.22 | 64.64,60.83 55.88,69.6 OSC.1 OSC.14 55.88,80.52 | R47K.1 JTAG.7 0.76,72.9 0.71,72.9 | TSTPT.5 TSTPT.6 TSTPT.8 35.56,80.52 | TSTPT.5 TSTPT.7 | CPLD2.21 64.77,6.35 64.77,0.71 | 3.81,80.52 C22U_0.+ | 98.55,46.99 98.81,46.99
  Top 0.61: 0.71,0.71 64.77,0.71 83.82,0.71 98.81,0.71 98.81,46.99 98.81,80.52 55.88,80.52 35.56,80.52 3.81,80.52 0.71,80.52 0.71,72.9 0.71,0.71
  Top 0.635: CON.16 98.55,46.99
  Bottom 0.508: 73.66,30.48 v82.55,30.48 | 73.66,34.29 68.58,39.37 C100N_11.2 | CPLD.78 73.66,34.29 | CPLD.64 64.77,27.94 69.09,27.94 69.85,28.7 69.85,30.48 73.66,30.48 | 73.66,30.48 CPLD.73 73.66,34.29 | CPLD2.32 72.64,10.16 70.1,12.7 C100N_12.2 69.85,12.7 68.58,13.97 C100N_6.2 | C100N_3.2 CPU.3 | C100N_10.2 55.88,49.53 53.34,52.07 CPLD.38 49.53,50.8 40.64,50.8 CPU.36
  pour Top (isolate 0.508): 0,0 0,81.28 99.57,81.28 99.57,0

## Text on the board
tPlace: GND TP1 VDD VDD J1 GND | GND TP0 VDD VDD J0 GND | GND TDI TCK NC | GND TMS TDO 5V | Beeb816 Revival! Mark2A | (C) 2020, Revaldinho, BigEd, Hoglet, http://github.com/BigEd/beeb816